# Altium PCB Kanaloa_v2.0.0_Motor.PcbDoc (part 3 of 3)
Units mil, origin at the board's own origin, x right, y up, seen from the top; angles counter-clockwise.
Board outline 5000 x 6000 mil, 4 copper layers (Top Layer, +24V, GND, Bottom Layer), stack 62 mil thick; 213 components, 187 nets, 1008 pads, 744 vias.
Unrouted connection lines stored in the file: 2.
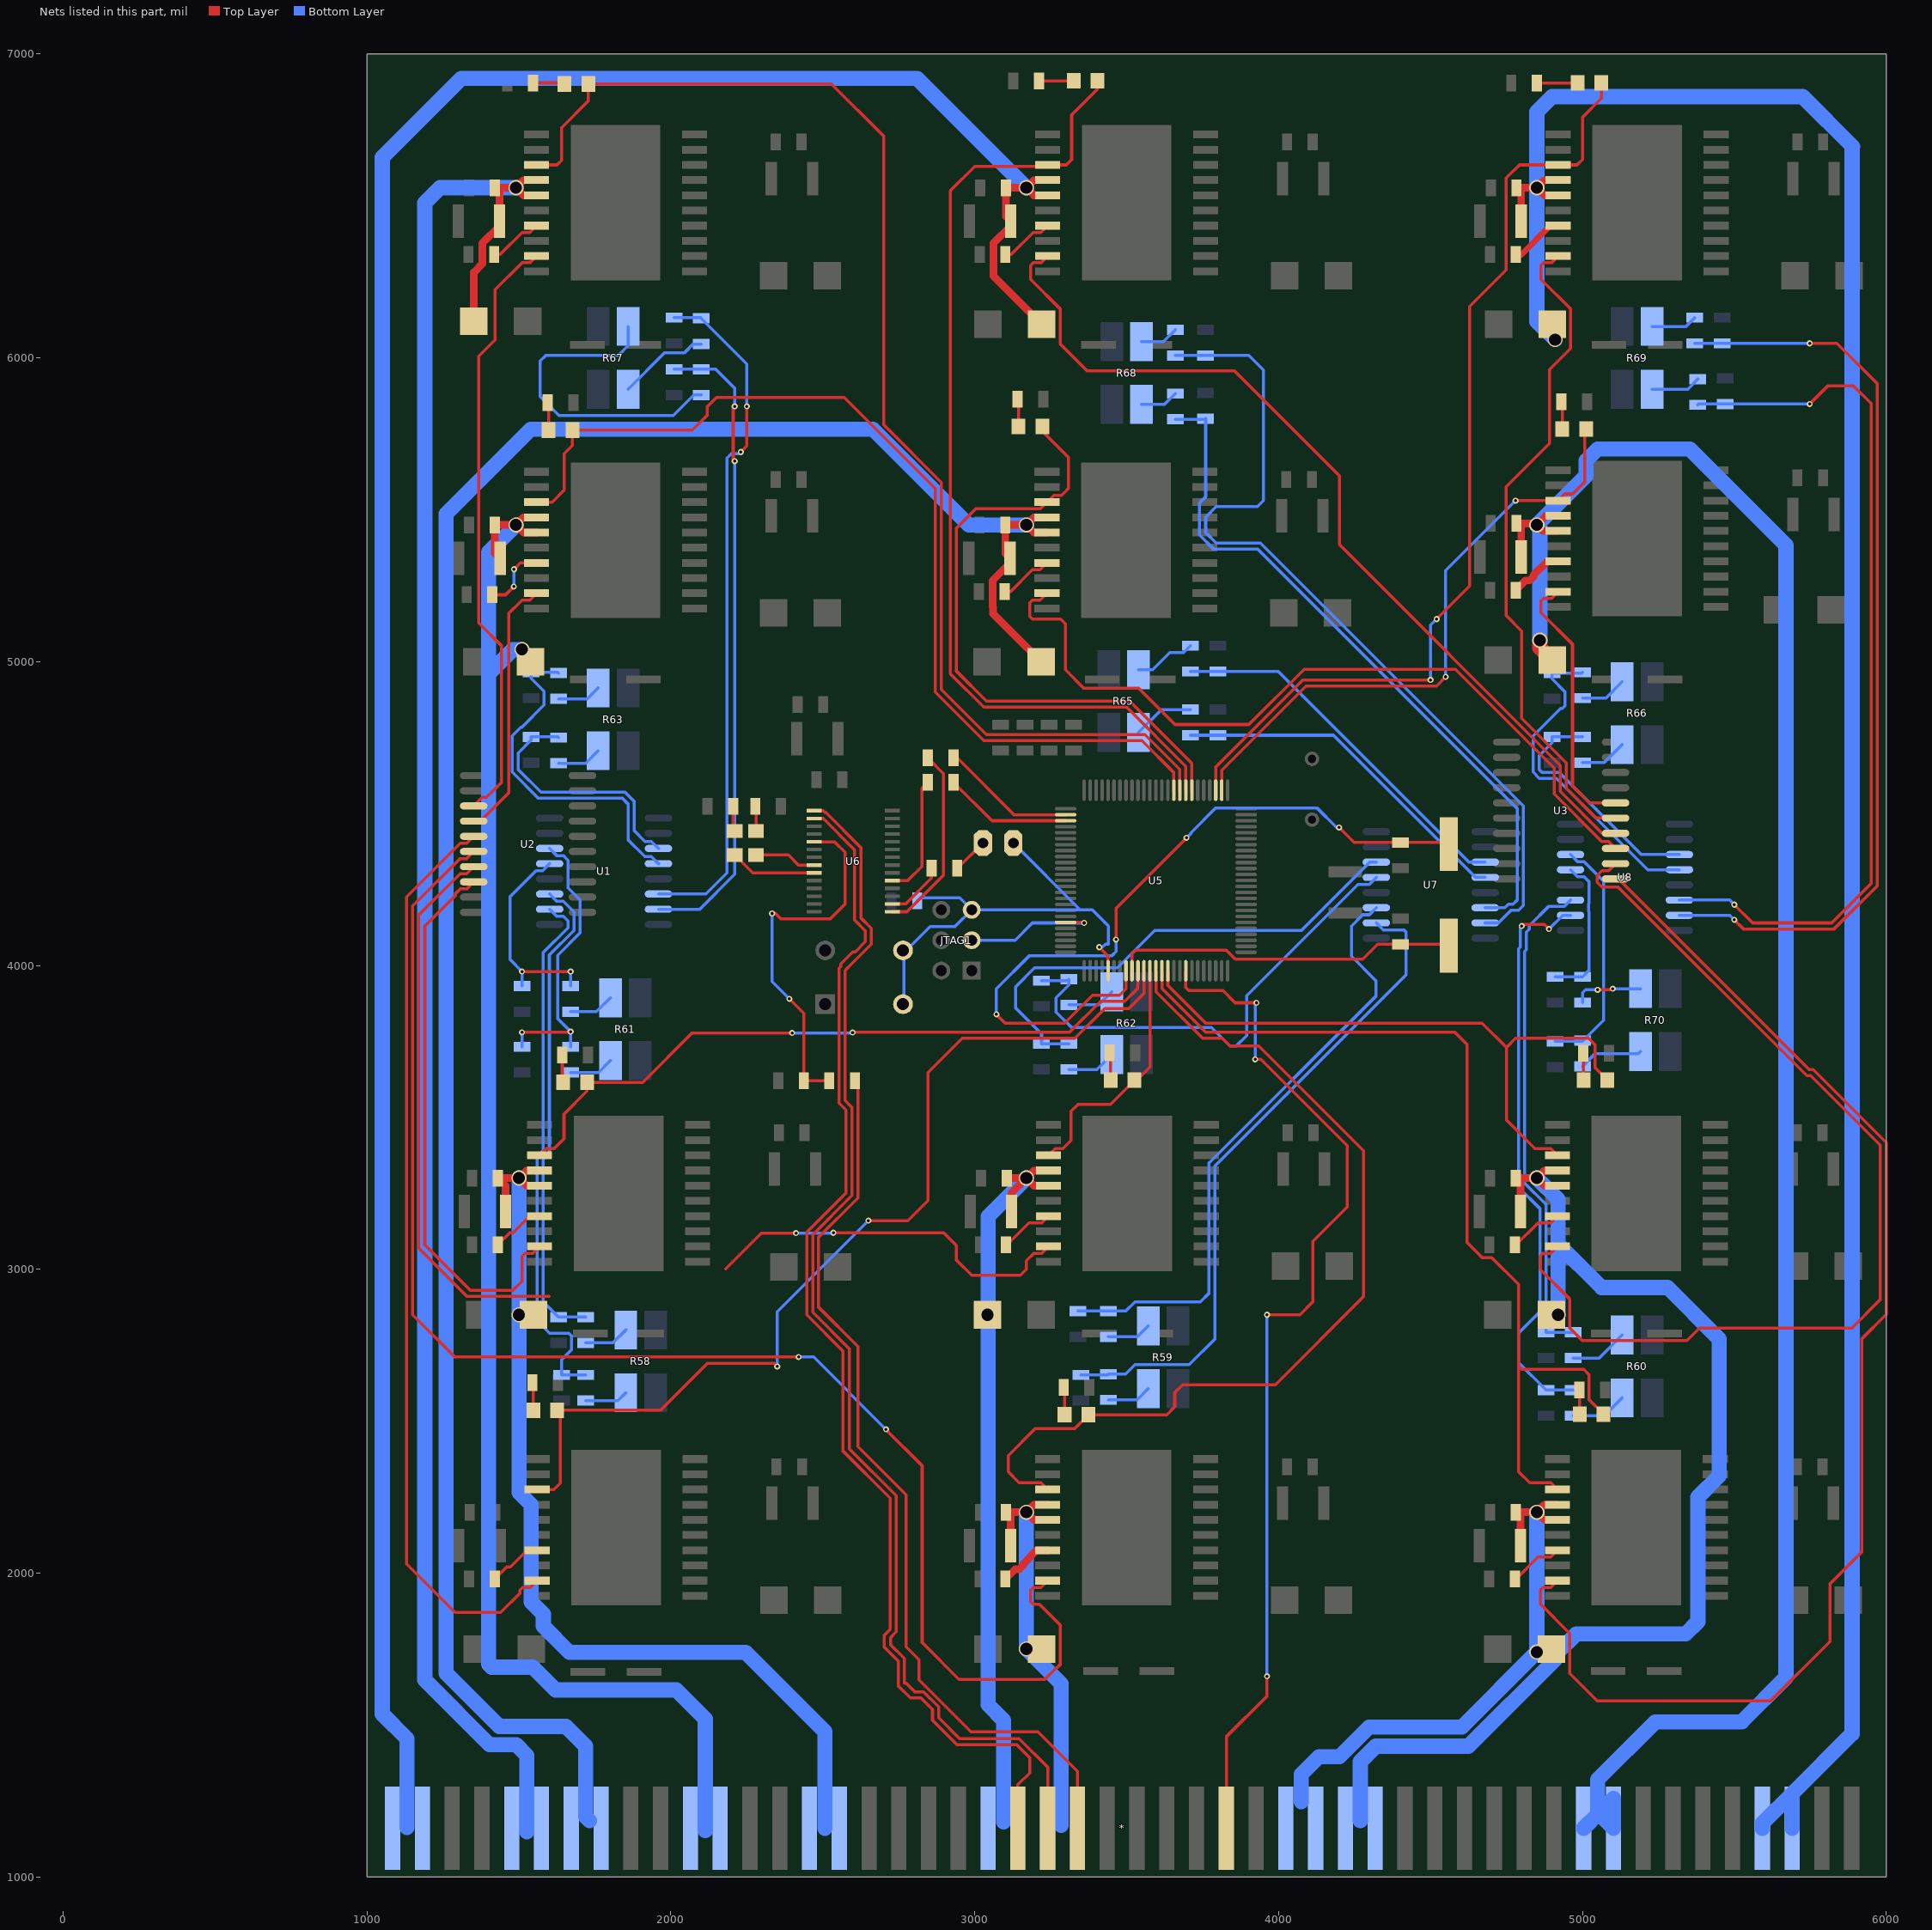
[diagram p5: the nets of this part, all layers, seen from the top]

## Via types
v1: diameter 50, hole 35, Top Layer to Bottom Layer, 336 vias
v2: diameter 20, hole 10, Top Layer to Bottom Layer, 183 vias
v3: diameter 30, hole 20, Top Layer to Bottom Layer, 137 vias
v4: diameter 50, hole 40, Top Layer to Bottom Layer, 87 vias
v5: diameter 25, hole 10, Top Layer to Bottom Layer, 1 vias

## Nets (pads, with @x,y where several pads share a name; then routed paths per layer and width w, separated by ;. In a path a pad name is that pad's centre, name@x,y a point inside that pad or via, vN(x,y) a via of type N, cw(c..) or ccw(c..) an arc to the next point about the centre after c; other vN are vias at no path point) (continued)
"MOTOR-_Motor 1": "C11_Motor 1.2" "C14_Motor 1.2" "D2_Motor 1.2" *.72 *.73 pad.14@3240.16,2225 pad.15@3240.16,2175 | length 1421.8
  Top Layer w25: 3118.54,2090 3118.54,2184.41 3102.95,2200 v4(3170,2200) ; pad.15@3240.16,2175 3195,2175 v4(3170,2200) ; pad.14@3240.16,2225 3195,2225 v4(3170,2200)
  Bottom Layer w50: v4(3170,2200) v4(3170,1750) 3284,1636 3284,1170
"MOTOR-_Motor 2": "C11_Motor 2.2" "C14_Motor 2.2" "D2_Motor 2.2" *.80 *.81 pad.14@4917.64,2225 pad.15@4917.64,2175 | length 1833.9
  Top Layer w25: 4796.02,2090 4796.02,2184.41 4780.43,2200 v4(4850,2200) ; pad.15@4917.64,2175 4875,2175 v4(4850,2200) ; pad.14@4917.64,2225 4875,2225 v4(4850,2200)
  Bottom Layer w50: 4075,1247 4075,1337 4133,1395 4200,1395 4298,1493 4603,1493 v4(4850,1740) v4(4850,2200)
"MOTOR-_Motor 3": "C11_Motor 3.2" "C14_Motor 3.2" "D2_Motor 3.2" *.64 *.65 pad.14@1567.83,3325 pad.15@1567.83,3275 | length 3243
  Top Layer w25: 1455.83,3190 1455.83,3274.8 1430.63,3300 v4(1500,3300) ; pad.15@1567.83,3275 1525,3275 v4(1500,3300) ; pad.14@1567.83,3325 1525,3325 v4(1500,3300)
  Bottom Layer w50: v4(1500,3300) v4(1500,2850) 1500,2264.85 1540,2224.85 1540,1905 1580,1865 1580,1825.15 1666.15,1739 2246,1739 2507,1478 2507,1160
"MOTOR-_Motor 4": "C11_Motor 4.2" "C14_Motor 4.2" "D2_Motor 4.2" *.70 *.71 pad.14@3242.48,3325 pad.15@3242.48,3275 | length 2553.1
  Top Layer w25: 3105.28,3300 v4(3170,3300) ; 3120.87,3190 3120.87,3250.87 v4(3170,3300) ; pad.15@3242.48,3275 3195,3275 v4(3170,3300) ; pad.14@3242.48,3325 3195,3325 v4(3170,3300)
  Bottom Layer w50: 3095,1181 3095,1515 3044,1566 3044,3174 v4(3170,3300)
  other v4: 3041.42,2850
"MOTOR-_Motor 5": "C11_Motor 5.2" "C14_Motor 5.2" "D2_Motor 5.2" *.82 *.83 pad.14@4917.83,3325 pad.15@4917.83,3275 | length 3944.3
  Top Layer w25: 4796.22,3190 4796.22,3284.41 4780.63,3300 v4(4850,3300) ; pad.15@4917.83,3275 4875,3275 v4(4850,3300) ; pad.14@4917.83,3325 4875,3325 v4(4850,3300)
  Bottom Layer w50: 4269,1185 4269,1379 4320,1430 4624.85,1430 4910,1715.15 4910,1730 4980,1800 5340,1800 5380,1840 5380,2249.71 5450,2319.71 5450,2770 5280,2940 5062.64,2940 4920,3082.64 ; v4(4850,3300) 4920,3230 4920,3082.64 ; v4(4920,2850) 4920,3082.64
"MOTOR-_Motor 6": "C11_Motor 6.2" "C14_Motor 6.2" "D2_Motor 6.2" *.60 *.61 pad.14@1557.87,5475 pad.15@1557.87,5425 | length 5416.2
  Top Layer w25: 1437.91,5340 1420.67,5357.24 1420.67,5450 v4(1490,5450) ; pad.15@1557.87,5425 1515,5425 v4(1490,5450) ; pad.14@1557.87,5475 1515,5475 v4(1490,5450)
  Bottom Layer w50: 1409,4969 1480,5040 v4(1510,5040) ; v4(1490,5450) 1400,5360 1400,1700 1410,1690 1545.44,1690 1620.44,1615 2018,1615 2113,1520 2113,1152
"MOTOR-_Motor 7": "C11_Motor 7.2" "C14_Motor 7.2" "D2_Motor 7.2" *.56 *.57 pad.14@3237.64,5475 pad.15@3237.64,5425 | length 7552.7
  Top Layer w25: 3218.11,5000 3060,5158.11 3060,5179.88 3058.88,5181 3058.88,5266.88 3116.02,5324.02 3116.02,5340 3100.43,5355.59 3100.43,5450 v4(3170,5450) ; pad.15@3237.64,5425 3195,5425 v4(3170,5450) ; pad.14@3237.64,5475 3195,5475 v4(3170,5450)
  Bottom Layer w50: 1732,1184.85 1719,1197.85 1719,1430 1654,1495 1435.15,1495 1260,1670.15 1260,5486.36 1538.64,5765 2665,5765 2980,5450 v4(3170,5450)
"MOTOR-_Motor 8": "C11_Motor 8.2" "C14_Motor 8.2" "D2_Motor 8.2" *.90 *.91 pad.14@4920,5480 pad.15@4920,5430 | length 6800.9
  Top Layer w25: 4798.39,5345 4798.39,5439.41 4782.8,5455 4845,5455 v4(4850,5450) ; pad.15@4920,5430 4870,5430 v4(4850,5450) ; pad.14@4920,5480 4880,5480 v4(4850,5450)
  Top Layer w50: v4(4860,5070) 4860,5045.47 4900.47,5005
  Bottom Layer w50: v4(4860,5070) 4860,5440 v4(4850,5450) 5011.73,5611.73 5011.73,5661.93 5049.8,5700 5353,5700 5670,5383 5670,1656 5524,1510 5240,1510 5050,1320 5050,1212 5053,1209 ; *.90@5004,1160 5053,1209 ; 5053,1209 5102,1258 *.91@5102,1160 5053,1209
"MOTOR-_Motor 9": "C11_Motor 9.2" "C14_Motor 9.2" "D2_Motor 9.2" *.54 *.55 pad.14@1557.83,6585 pad.15@1557.83,6535 | length 6580.8
  Top Layer w25: 1351.42,6120 1351.42,6281.42 1379.07,6309.07 1379.07,6376.88 1436.22,6434.02 1436.22,6450 1436.22,6544.41 1420.63,6560 v4(1490,6560) ; pad.15@1557.83,6535 1515,6535 v4(1490,6560) ; pad.14@1557.83,6585 1515,6585 v4(1490,6560)
  Bottom Layer w50: v4(1490,6560) 1240,6560 1190,6510 1190,1648 1403,1435 1491,1435 1526,1400 1526,1148
"MOTOR-_Motor 10": "C11_Motor 10.2" "C14_Motor 10.2" "D2_Motor 10.2" *.50 *.51 pad.14@3240.16,6585 pad.15@3240.16,6535 | length 8682.5
  Top Layer w25: 3220.63,6110 3061.4,6269.23 3061.4,6376.88 3118.54,6434.02 3118.54,6450 3102.95,6465.59 3102.95,6560 v4(3170,6560) ; pad.15@3240.16,6535 3195,6535 v4(3170,6560) ; pad.14@3240.16,6585 3195,6585 v4(3170,6560)
  Bottom Layer w50: 1131,1162 1131,1455 1050,1536 1050,6660 1310,6920 2810,6920 v4(3170,6560)
"MOTOR-_Motor 11": "C11_Motor 11.2" "C14_Motor 11.2" "D2_Motor 11.2" *.96 *.97 pad.14@4920.16,6585 pad.15@4920.16,6535 | length 8019.3
  Top Layer w25: 4798.54,6450 4798.54,6544.41 4782.95,6560 v4(4850,6560) ; pad.15@4920.16,6535 4875,6535 v4(4850,6560) ; pad.14@4920.16,6585 4875,6585 v4(4850,6560)
  Bottom Layer w50: v4(4910,6060) 4850,6120 v4(4850,6560) 4850,6810 4900,6860 5725.15,6860 5890,6695.15 ; *.96@5592,1160 5592,1176 *.97@5690,1274 ; *.97@5690,1160 *.97@5690,1274 ; 5886,1470 *.97@5690,1274 ; 5887.5,1470 5887.5,6695.15
Net29_1: R27.2 R29.1 U7.6 | length 1669.7
  Bottom Layer w10: R27.2@3310,3742.32 R29.1@3220,3742.32 3220,3774.64 3135,3859.64 3135,3930.5 3196.82,3992.32 3470,3992.32 3592.98,4115.3 4075.3,4115.3 4300,4340 U7.6@4321.73,4340
NetC4_2: C4.2@2857.68,4320 U6.2 | length 196.4
  Top Layer w10: U6.2@2728.94,4202.33 2772.33,4202.33 2857.68,4287.68 C4.2@2857.68,4320
"NetC9_Motor 0_2": C9_0.2 pad.17@1559.53,2075 | length 185.9
  Top Layer w10: C9_0.2@1420,1980 1459.88,2019.88 1471.61,2019.88 1526.73,2075 pad.17@1559.53,2075 pad.17@1554.53,2070
"NetC9_Motor 1_2": "C9_Motor 1.2" pad.17@3240.16,2075 | length 181.8
  Top Layer w25: 3100.63,1980 3133.01,2012.38 3146.56,2012.38 3159.74,2025.56 3159.74,2030.54 3204.2,2075 pad.17@3240.16,2075
"NetC9_Motor 2_2": "C9_Motor 2.2" pad.17@4917.64,2075 | length 178.9
  Top Layer w10: 4778.11,1980 4781.06,1980 4853.85,2052.8 4895.43,2052.8 pad.17@4917.64,2075
"NetC9_Motor 3_2": "C9_Motor 3.2" pad.17@1567.83,3175 | length 177.2
  Top Layer w10: 1430,3080 1469.88,3119.88 1480.74,3119.88 1535.86,3175 pad.17@1567.83,3175
"NetC9_Motor 4_2": "C9_Motor 4.2" pad.17@3242.48,3175 | length 178.9
  Top Layer w10: 3102.95,3080 3105.9,3080 3178.69,3152.8 3220.28,3152.8 pad.17@3242.48,3175
"NetC9_Motor 5_2": "C9_Motor 5.2" pad.17@4917.83,3175 | length 178.9
  Top Layer w10: 4778.31,3080 4781.25,3080 4854.05,3152.8 4895.63,3152.8 pad.17@4917.83,3175
"NetC9_Motor 6_2": "C9_Motor 6.2" pad.17@1557.87,5325 | length 221.8
  Top Layer w10: 1412.32,5220 1456,5220 v2(1483,5247) ; v2(1484,5304) 1505,5325 pad.17@1557.87,5325
  Bottom Layer w10: v2(1483,5247) 1483,5303 v2(1484,5304)
"NetC9_Motor 7_2": "C9_Motor 7.2" pad.17@3237.64,5325 | length 178.9
  Top Layer w10: 3098.11,5230 3117.29,5230 3190.09,5302.8 3215.43,5302.8 pad.17@3237.64,5325
"NetC9_Motor 8_2": "C9_Motor 8.2" pad.17@4920,5330 | length 181.8
  Top Layer w25: 4780.47,5235 4812.85,5267.38 4826.41,5267.38 4839.59,5280.56 4839.59,5285.54 4884.05,5330 pad.17@4920,5330
"NetC9_Motor 9_2": "C9_Motor 9.2" pad.17@1557.83,6435 | length 178.9
  Top Layer w10: 1418.31,6340 1437.49,6340 1510.28,6412.8 1535.63,6412.8 pad.17@1557.83,6435
"NetC9_Motor 10_2": "C9_Motor 10.2" pad.17@3240.16,6435 | length 178.9
  Top Layer w10: 3100.63,6340 3119.81,6340 3192.61,6412.8 3217.95,6412.8 pad.17@3240.16,6435
"NetC9_Motor 11_2": "C9_Motor 11.2" pad.17@4920.16,6435 | length 178.9
  Top Layer w20: 4780.63,6340 4799,6340 4894,6435 pad.17@4920.16,6435
"NetLED2_Motor 0_1": LED2.1@1547,2536 R3.1 | length 91.2
  Top Layer w10: R3.1@1544.05,2626 1547,2623.05 LED2.1@1547,2536
"NetLED2_Motor 1_1": "LED2_Motor 1.1" "R3_Motor 1.1" | length 91.2
  Top Layer w10: 3292.68,2611 3295.63,2608.05 3295.63,2521
"NetLED2_Motor 2_1": "LED2_Motor 2.1" "R3_Motor 2.1" | length 80.3
  Top Layer w10: 4990,2603 4990,2523.63 4990.63,2523
"NetLED2_Motor 3_1": "LED2_Motor 3.1" "R3_Motor 3.1" | length 91.2
  Top Layer w10: 1642.35,3705 1642.35,3617.95 1645.31,3615
"NetLED2_Motor 4_1": "LED2_Motor 4.1" "R3_Motor 4.1" | length 91.2
  Top Layer w10: 3444,3712 3446.95,3709.05 3446.95,3622
"NetLED2_Motor 5_1": "LED2_Motor 5.1" "R3_Motor 5.1" | length 89.4
  Top Layer w10: 5002.68,3711 5003.63,3710.05 5003.63,3622
"NetLED2_Motor 6_1": "LED2_Motor 6.1" "R3_Motor 6.1" | length 91.2
  Top Layer w10: 1594.39,5852 1597.35,5849.05 1597.35,5762
"NetLED2_Motor 7_1": "LED2_Motor 7.1" "R3_Motor 7.1" | length 91.2
  Top Layer w10: 3141.16,5864 3144.11,5861.05 3144.11,5774
"NetLED2_Motor 8_1": "LED2_Motor 8.1" "R3_Motor 8.1" | length 91.2
  Top Layer w10: 4930.52,5856 4933.47,5853.05 4933.47,5766
"NetLED2_Motor 9_1": "LED2_Motor 9.1" "R3_Motor 9.1" | length 104.7
  Top Layer w10: 1546.32,6905 1646.16,6905 1649.63,6901.53
"NetLED2_Motor 10_1": "LED2_Motor 10.1" "R3_Motor 10.1" | length 114.7
  Top Layer w10: 3211.32,6911 3212.32,6912 3325.63,6912
"NetLED2_Motor 11_1": "LED2_Motor 11.1" "R3_Motor 11.1" | length 133.7
  Top Layer w10: 4850.32,6904 4982.63,6904 4983.63,6905
NetR4_2: R4.2 U6.1 | length 625.3
  Top Layer w10: U6.1@2728.94,4176.74 2776.74,4176.74 2897,4297 2897,4631.43 R4.2@2845.35,4683.08
NetR5_2: R5.2 U6.5 | length 401.6
  Top Layer w10: U6.5@2728.94,4279.1 2779.1,4279.1 2825.94,4325.94 2825.94,4583.67 R5.2@2845.35,4603.08
NetR10_1: R10.1 R58.0 | length 149.1
  Bottom Layer w10: R10.1@1720,2757.68 1809.25,2757.68 R58.0@1851.57,2800
NetR10_2: R10.2 R12.1 U1.3 | length 1591.1
  Bottom Layer w10: U1.3@1600.87,4235 1624.06,4211.81 1645.44,4211.81 1681.14,4176.11 1681.14,4115.61 1600,4034.47 1600,3383.43 1580,3363.43 1580,2892.32 R12.1@1630,2842.32 R10.2@1720,2842.32
NetR11_1: R11.1 R58.2 | length 142.2
  Bottom Layer w10: R11.1@1720,2567.68 1825.94,2567.68 R58.2@1851.57,2593.31
NetR11_2: R11.2 R13.1 U1.2 | length 1789.2
  Bottom Layer w10: U1.2@1600.87,4185 1624.06,4161.81 1645.44,4161.81 1661.14,4146.11 1661.14,4123.89 1580,4042.75 1580,3391.72 1560,3371.72 1560,2830 1600.59,2789.41 1663.77,2789.41 1672.56,2780.62 1672.56,2734.73 1640,2702.17 R13.1@1640,2652.32 R11.2@1720,2652.32
NetR14_1: R14.1 R59.0 | length 145.6
  Bottom Layer w10: R14.1@3440,2777.68 3535.12,2777.68 R59.0@3570.79,2813.35
NetR14_2: R14.2 R16.1 U7.3 | length 2032.2
  Bottom Layer w10: R16.1@3340,2862.32 R14.2@3440,2862.32 3497.17,2862.32 3527.17,2892.32 3742.32,2892.32 3770,2920 3770,3350 3771.72,3350 4320,3898.28 4320,3950 4240,4030 4240,4129.65 4277.16,4166.81 4298.54,4166.81 U7.3@4321.73,4190
NetR15_1: R15.1 R59.2 | length 146
  Bottom Layer w10: R15.1@3440,2570 3534.13,2570 R59.2@3570.79,2606.65
NetR15_2: R15.2 R17.1 U7.2 | length 2200.4
  Bottom Layer w10: R17.1@3350,2652.32 3437.68,2652.32 R15.2@3440,2654.65 3496.19,2654.65 3527.17,2685.63 3705.63,2685.63 3790,2770 3790,3340 4420,3970 4420,4110 4413.19,4116.81 4344.92,4116.81 U7.2@4321.73,4140
NetR18_1: R18.1 R60.0 | length 192.1
  Bottom Layer w10: R18.1@4970,2707.68 5055.12,2707.68 R60.0@5130.79,2783.35
NetR18_2: R18.2 R20.1 U8.3 | length 1634.2
  Bottom Layer w10: U8.3@4960.87,4215 4940.87,4195 4889.64,4195 4825,4130.36 4825,4119.64 4815,4109.64 4815,4051.36 4810,4046.36 4810,3283.43 4880,3213.43 R20.1@4880,2792.32 R18.2@4970,2792.32
NetR19_1: R19.1 R60.2 | length 185.2
  Bottom Layer w10: R19.1@4970,2517.68 5071.81,2517.68 R60.2@5130.79,2576.65
NetR19_2: R19.2 R21.1 U8.2 | length 1904.9
  Top Layer w10: v2(4800,4130) 4805,4135 4875,4135 v2(4890,4120)
  Bottom Layer w10: v2(4800,4130) 4795,4125 4795,4059.64 4790,4054.64 4790,3270 4860,3200 4860,2860 4790,2790 4790,2692.32 R21.1@4880,2602.32 R19.2@4970,2602.32 ; v2(4890,4120) 4935,4165 U8.2@4960.87,4165
NetR22_1: R22.1 R61.0 | length 149.7
  Bottom Layer w10: R22.1@1670,3847.68 1755.12,3847.68 R61.0@1800.79,3893.35
NetR22_2: R22.2 R24.1 U1.5 | length 693.7
  Top Layer w10: v2(1510,3980) v2(1670,3980)
  Bottom Layer w10: R24.1@1510,3932.32 v2(1510,3980) 1470,4020 1470,4225.51 1556.3,4311.81 1577.68,4311.81 U1.5@1600.87,4335 ; R22.2@1670,3932.32 v2(1670,3980)
NetR23_1: R23.1 R61.2 | length 146.9
  Bottom Layer w10: R23.1@1670,3647.68 1761.81,3647.68 R61.2@1800.79,3686.65
NetR23_2: R23.2 R25.1 U1.6 | length 963.5
  Top Layer w10: v2(1510,3780) 1667.83,3780 v2(1670,3782.17)
  Bottom Layer w10: R25.1@1510,3732.32 v2(1510,3780) ; U1.6@1600.87,4385 1624.06,4361.81 1645.44,4361.81 1661.14,4346.11 1661.14,4255.53 1701.14,4215.53 1701.14,4107.33 1627.44,4033.63 1627.44,3824.73 v2(1670,3782.17) R23.2@1670,3732.32
NetR26_1: R26.1 R62.0 | length 158.7
  Bottom Layer w10: R26.1@3310,3870 3407.44,3870 R62.0@3450.79,3913.35
NetR26_2: R26.2 R28.1 U7.5 | length 1624.3
  Bottom Layer w10: R28.1@3220,3950 3305.35,3950 R26.2@3310,3954.65 3310,3935.5 3267.44,3892.95 3267.44,3847.05 3319.14,3795.35 3779.29,3795.35 3839.64,3735 3860.36,3735 3894.65,3769.29 3894.65,3900 4261.46,4266.81 4298.54,4266.81 U7.5@4321.73,4290
NetR27_1: R27.1 R62.2 | length 161.1
  Bottom Layer w10: R27.1@3310,3657.68 3401.81,3657.68 R62.2@3450.79,3706.65
NetR30_1: R30.1 R70.0 | length 235.3
  Top Layer w10: v2(5050,3920) 5096.65,3920 v2(5100,3923.35)
  Bottom Layer w10: R30.1@5000,3877.68 5000,3910 5010,3920 v2(5050,3920) ; v2@5093.35,3923.35 v2(5100,3923.35) R70.0@5190.79,3923.35
NetR30_2: R30.2 R32.1 U8.5 | length 489.9
  Bottom Layer w10: R32.1@4910,3962.32 R30.2@5000,3962.32 5021.14,3983.46 5021.14,4177.25 5020,4178.39 5020,4202.75 5021.14,4203.89 5021.14,4276.11 5005.44,4291.81 4984.06,4291.81 U8.5@4960.87,4315
NetR31_1: R31.1 R70.2 | length 211.1
  Bottom Layer w10: R31.1@5000,3667.68 5042.32,3710 5184.13,3710 R70.2@5190.79,3716.65
NetR31_2: R31.2 R33.1 U8.6 | length 791.7
  Bottom Layer w10: R33.1@4910,3750 4997.68,3750 R31.2@5000,3752.32 5002.32,3752.32 5070,3820 5070,4277.25 5005.44,4341.81 4984.06,4341.81 U8.6@4960.87,4365
NetR34_1: R34.1 R63.0 | length 145.6
  Bottom Layer w10: R34.1@1630,4877.68 1725.12,4877.68 R63.0@1760.79,4913.35
NetR34_2: R34.2 R36.1 U1.12 | length 1157.9
  Bottom Layer w10: R34.2@1630,4962.32 1627.68,4964.65 R36.1@1540,4964.65 1540,4945.5 1582.56,4902.95 1582.56,4857.05 1509.56,4784.06 1506.23,4784.06 1477.44,4755.27 1477.44,4636.45 1563.89,4550 1840.57,4550 1858.86,4531.72 1858.86,4413.89 1914.56,4358.19 1935.94,4358.19 U1.12@1959.13,4335
NetR35_1: R35.1 R63.2 | length 147.9
  Bottom Layer w10: R35.1@1630,4665.35 1719.49,4665.35 R63.2@1760.79,4706.65
NetR35_2: R35.2 R37.1 U1.11 | length 841.8
  Bottom Layer w10: R35.2@1630,4750 1627.68,4752.32 R37.1@1540,4752.32 1540,4741.97 1497.44,4699.41 1497.44,4644.73 1572.17,4570 1848.86,4570 1878.86,4540 1878.86,4443.89 1914.56,4408.19 1935.94,4408.19 U1.11@1959.13,4385
NetR38_1: R38.1 R65.0 | length 202.1
  Bottom Layer w10: R65.0@3539.21,4766.65 3614.88,4842.32 R38.1@3710,4842.32
NetR38_2: R38.2 R40.1 U7.12 | length 1163.7
  Bottom Layer w10: R38.2@3710,4757.68 R40.1@3800,4757.68 4180.61,4757.68 4648.28,4290 U7.12@4680,4290
NetR39_1: R39.1 R65.2 | length 203.5
  Bottom Layer w10: R65.2@3539.21,4973.35 3585.06,4973.35 3641.72,5030 3687.68,5030 R39.1@3710,5052.32
NetR39_2: R39.2 R41.1 U7.11 | length 1230
  Bottom Layer w10: R39.2@3710,4967.68 R41.1@3800,4967.68 3998.89,4967.68 4626.57,4340 U7.11@4680,4340
NetR42_1: R42.1 R66.0 | length 152.9
  Bottom Layer w10: R42.1@5000,4880 5077.44,4880 R66.0@5130.79,4933.35
NetR42_2: R42.2 R44.1 U8.12 | length 1106.2
  Bottom Layer w10: R42.2@5000,4964.65 4997.68,4962.32 R44.1@4900,4962.32 4900,4943.18 4942.56,4900.62 4942.56,4854.73 4933.77,4845.94 4928.12,4845.94 4837.44,4755.27 4837.44,4636.45 4857.94,4615.94 4914.06,4615.94 5215,4315 U8.12@5319.13,4315
NetR43_1: R43.1 R66.2 | length 155.2
  Bottom Layer w10: R43.1@5000,4667.68 5071.81,4667.68 R66.2@5130.79,4726.65
NetR43_2: R43.2 R45.1 U8.11 | length 802.8
  Bottom Layer w10: R43.2@5000,4752.32 R45.1@4900,4752.32 4900,4733.18 4857.44,4690.62 4857.44,4644.73 4866.23,4635.94 4922.34,4635.94 5193.28,4365 U8.11@5319.13,4365
NetR46_1: R46.1 R67.0 | length 302.4
  Bottom Layer w10: R67.0@1859.21,5896.65 1978.5,6015.94 2043.77,6015.94 2073.18,6045.35 R46.1@2100,6045.35
NetR46_2: R46.2 R48.1 U1.14 | length 2274.7
  Top Layer w10: v2(2230,5690) 2250,5710 v2(2250,5840)
  Bottom Layer w10: U1.14@1959.13,4235 2115,4235 2185,4305 2185,5670.36 2199.64,5685 2225,5685 v2(2230,5690) ; R48.1@2010,6132.32 2097.68,6132.32 R46.2@2100,6130 2250,5980 v2(2250,5840)
NetR47_1: R47.1 R67.2 | length 1074.9
  Bottom Layer w10: R67.2@1859.21,6103.35 1859.21,6040.21 1826.5,6007.5 1587.5,6007.5 1570,5990 1570,5871.89 1631.89,5810 2007.83,5810 2075.5,5877.68 R47.1@2100,5877.68
NetR47_2: R47.2 R49.1 U1.15 | length 2128.5
  Top Layer w10: v2(2210,5660) 2205,5665 2205,5835 v2(2210,5840)
  Bottom Layer w10: U1.15@1959.13,4185 2095,4185 2210,4300 v2(2210,5660) ; R49.1@2010,5962.32 R47.2@2100,5962.32 2147.68,5962.32 2210,5900 v2(2210,5840)
NetR50_1: R50.1 R68.0 | length 125.6
  Bottom Layer w10: R68.0@3549.21,5846.65 3624.33,5846.65 R50.1@3660,5882.32
NetR50_2: R50.2 R52.1 U7.14 | length 2327.3
  Bottom Layer w10: R50.2@3660,5797.68 3757.68,5797.68 R52.1@3760,5800 3760,5542.43 3740,5522.43 3740,5416.86 3786.86,5370 3931.72,5370 4785,4516.72 4785,4215 4771.82,4201.82 4756.63,4201.82 4744.81,4190 U7.14@4680,4190
NetR51_1: R51.1 R68.2 | length 126.9
  Bottom Layer w10: R68.2@3549.21,6053.35 3621.02,6053.35 R51.1@3660,6092.32
NetR51_2: R51.2 R53.1 U7.15 | length 2896.9
  Bottom Layer w10: R51.2@3660,6007.68 R53.1@3760,6007.68 3902.32,6007.68 3950,5960 3950,5530 3930,5510 3795.15,5510 3760,5474.85 3760,5425.15 3795.15,5390 3940,5390 4805,4525 4805,4196.82 4790,4181.82 4764.92,4181.82 4723.1,4140 U7.15@4680,4140
NetR54_1: R54.1 R69.0 | length 164.6
  Bottom Layer w10: R69.0@5229.21,5896.65 5346.65,5896.65 R54.1@5380,5930
NetR54_2: R54.2 R56.1 U8.14 | length 2915
  Top Layer w10: v2(5500,4200) 5560,4140 5820,4140 5950,4270 5950,5850 5892.93,5907.07 5807.07,5907.07 v2(5747.68,5847.68)
  Bottom Layer w10: U8.14@5319.13,4215 5485,4215 v2(5500,4200) ; R54.2@5380,5845.35 5382.32,5847.68 R56.1@5470,5847.68 v2(5747.68,5847.68)
NetR55_1: R55.1 R69.2 | length 152.8
  Bottom Layer w10: R69.2@5229.21,6103.35 5341.02,6103.35 R55.1@5370,6132.32
NetR55_2: R55.2 R57.1 U8.15 | length 3036.7
  Top Layer w10: v2(5500,4150) 5530,4120 5828.28,4120 5970,4261.72 5970,5915.35 5837.68,6047.68 v2(5747.68,6047.68)
  Bottom Layer w10: U8.15@5319.13,4165 5485,4165 v2(5500,4150) ; R55.2@5370,6047.68 R57.1@5460,6047.68 v2(5747.68,6047.68)
prejumpreset: 1.1 C4.1@2942.32,4320 | length 119.1
  Top Layer w10: C4.1@2942.32,4320 2944,4320 1.1@3027,4403
PWM0: LED2.2@1625.74,2536 pad.13@1559.53,2275 U5.36 | length 3265.5
  Top Layer w10: pad.13@1559.53,2275 1615,2275 1635.87,2295.87 1635.87,2521.75 LED2.2@1621.61,2536 ; LED2.2@1625.74,2536 1966,2536 2120,2690 2340,2690 v2(2350,2680) ; v2(2650,3160) 2780,3160 2846,3226 2846,3647 2959,3760 3330,3760 3428,3858 3507,3858 3556.54,3907.54 3556.54,3926.54 ; 3556.54,3926.85 3556.54,3926.54 ; U5.36@3556.85,3982.32 3556.85,3926.85 3556.54,3926.54
  Bottom Layer w10: v2(2350,2680) 2350,2860 v2(2650,3160)
PWM1: "LED2_Motor 1.2" pad.13@3240.16,2275 U5.38 | length 3050.7
  Top Layer w10: pad.13@3240.16,2275 3217.95,2297.2 3146.23,2297.2 3110,2333.43 3110,2386.57 3199,2475.57 3328.94,2475.57 3374.37,2521 3370.24,2521 ; 3398.37,2521 3631.86,2521 3658.27,2547.41 3658.27,2593.77 3684.5,2620 3990,2620 4280,2910 4280,3390 3935,3735 3839.64,3735 3814.64,3760 3750,3760 3596.54,3913.46 U5.38@3596.54,3982.32
PWM2: "LED2_Motor 2.2" pad.13@4917.64,2275 U5.39 | length 3178.6
  Top Layer w10: U5.39@3615.91,3982.32 3615.91,3924.09 3760,3780 4580,3780 4620,3740 4620,3088.16 4670.72,3037.44 4702.56,3037.44 4790,2950 4790,2680 ; pad.13@4917.64,2275 4895.43,2297.2 4826.23,2297.2 4790,2333.43 4790,2680 ; 5069.37,2523 5021.73,2570.64 5021.73,2652.77 5004.5,2670 4800,2670 4790,2680
PWM3: "LED2_Motor 3.2" pad.13@1567.83,3375 U5.35 | length 2313.6
  Top Layer w10: pad.13@1567.83,3375 1590.04,3397.2 1615.39,3397.2 1648,3429.82 1648,3510 1724.05,3586.05 1724.05,3615 1907.17,3615 2070.17,3778 v2(2399,3778) ; v2(2598,3779) 2599,3780 3312,3780 3414,3882 3494,3882 3536.54,3924.54 3536.54,3935.45 3536.85,3935.76 3536.85,3942.6 ; U5.35@3537.17,3947.17 U5.35@3537.17,3982.32
  Bottom Layer w10: v2(2399,3778) 2597,3778 v2(2598,3779)
PWM4: "LED2_Motor 4.2" pad.13@3242.48,3375 U5.37 | length 831.2
  Top Layer w10: pad.13@3242.48,3375 3264.68,3397.2 3290.03,3397.2 3317,3424.17 3317,3520 3340,3543 3446.69,3543 3525.69,3622 ; 3521.57,3622 3525.69,3622 ; U5.37@3576.54,3982.32 3576.54,3666 3532.54,3622 3525.69,3622
PWM5: "LED2_Motor 5.2" pad.13@4917.83,3375 U5.40 | length 2148.1
  Top Layer w10: U5.40@3635.59,3982.32 3635.59,3934.41 3760,3810 4670,3810 4750,3730 ; pad.13@4917.83,3375 4895.63,3397.2 4843.9,3397.2 4750,3491.11 4750,3730 ; 5082.37,3622 5042,3662.37 5042,3738 5020,3760 4780,3760 4750,3730
PWM6: "LED2_Motor 6.2" pad.13@1557.87,5525 U5.85 | length 3318.3
  Top Layer w10: pad.13@1557.87,5525 1609,5525 1649,5565 1649,5684 1676.09,5711.09 1676.09,5762 2070,5762 2120,5812 2120,5840 2150,5870 2570,5870 2870,5570 2870,4900 3030,4740 3550,4740 3655.28,4634.72 U5.85@3655.28,4576.81
PWM7: "LED2_Motor 7.2" pad.13@3237.64,5525 U5.82 | length 2122
  Top Layer w10: 3222.85,5774 3222.85,5758.15 3309,5672 3309,5571.02 3293.98,5555.99 3285.19,5547.2 3259.84,5547.2 pad.13@3237.64,5525 3215.43,5502.8 3003.08,5502.8 2940,5439.72 2940,4968.28 3038.28,4870 3510,4870 3714.33,4665.67 U5.82@3714.33,4576.81
PWM8: "LED2_Motor 8.2" pad.13@4920,5530 U5.77 | length 2033.1
  Top Layer w10: U5.77@3812.76,4576.81 3812.76,4642.76 4090,4920 4520,4920 v2(4550,4950) ; v2(4780,5530) pad.13@4920,5530 4942.2,5552.2 4967.55,5552.2 5008.09,5592.74 5008.09,5766
  Bottom Layer w10: v2(4550,4950) 4550,5300 v2(4780,5530)
PWM9: "LED2_Motor 9.2" pad.13@1557.83,6635 U5.84 | length 4282
  Top Layer w10: pad.13@1557.83,6635 1625,6635 1639.92,6649.92 1639.92,6757 1728.37,6845.45 1728.37,6901.53 2528.47,6901.53 2700,6730 2700,5780 2890,5590 2890,4908 3038,4760 3560,4760 3674.96,4645.04 U5.84@3674.96,4576.81
PWM10: "LED2_Motor 10.2" pad.13@3240.16,6635 U5.83 | length 3305.4
  Top Layer w10: 3404.37,6912 3404.37,6885.37 3319,6800 3319,6653 3301,6635 pad.13@3240.16,6635 3235.16,6630 3000,6630 2920,6550 2920,4960 3030,4850 3500,4850 3694.65,4655.35 U5.83@3694.65,4576.81
PWM11: "LED2_Motor 11.2" pad.13@4920.16,6635 U5.78 | length 3211
  Top Layer w10: U5.78@3793.07,4576.81 3793.07,4653.07 4080,4940 v2(4500,4940) ; v2(4520,5140) 4628.86,5248.86 4628.86,6168.86 4748.9,6288.9 4748.9,6591.45 4792.45,6635 pad.13@4920.16,6635 4982,6635 5000,6653 5000,6792 5062.37,6854.37 5062.37,6905
  Bottom Layer w10: v2(4500,4940) 4500,5120 v2(4520,5140)
RESET: 1.2 10k.2 ?.2 ?.4 JTAG1.5 U5.30 | length 1625
  Top Layer w10: v2(3410,4060) 3438.74,4031.26 U5.30@3438.74,3982.32
  Bottom Layer w10: ?.2@2767.17,3864.5 2767.17,4041.66 2853.11,4127.61 2934.53,4127.61 JTAG1.5@2990,4183.08 ; 10k.2@2810.65,4213 2820.25,4222.61 2950.47,4222.61 JTAG1.5@2990,4183.08 ; 1.2@3127,4403 3346.92,4183.08 ; v2(3410,4060) 3420,4060 3430,4070 3440,4070 3440,4130 3386.92,4183.08 3346.92,4183.08 ; JTAG1.5@2990,4183.08 3346.92,4183.08
RESET#: R8.2 R9.1 U6.19 | length 1231.4
  Top Layer w10: v2(2333,4171) 2344,4171 2361,4154 2525,4154 2573,4202 2573,4372 2537.94,4407.06 U6.19@2471.06,4407.06 ; v2(2390,3890) 2437.65,3842.35 R9.1@2437.65,3620.08 2520,3620.08 R8.2@2521,3621.08
  Bottom Layer w10: v2(2333,4171) 2333,3947 v2(2390,3890)
RLED: LED2.2@2280,4442.45 R7.1 | length 81.6
  Top Layer w10: R7.1@2277.68,4523.08 2280,4520.76 LED2.2@2280,4442.45
"RX LED": LED2.1@2280,4363.71 U6.22 | length 204.9
  Top Layer w10: LED2.1@2280,4363.71 2386.29,4363.71 2419.72,4330.28 U6.22@2471.06,4330.28
SCK: JTAG1.3 U5.20 | length 455.3
  Top Layer w10: U5.20@3298.98,4141.77 3358.23,4141.77 v2(3360,4140)
  Bottom Layer w10: JTAG1.3@2990,4083.08 3133.08,4083.08 3190,4140 v2(3360,4140)
SCL: 
TLED: LED1.2 R6.1 | length 82.8
  Top Layer w10: R6.1@2204.65,4523.08 2204.65,4447.8 LED1.2@2210,4442.45
"TX LED": LED1.1 U6.23 | length 285.5
  Top Layer w10: LED1.1@2210,4363.71 2269.02,4304.69 U6.23@2471.06,4304.69
UC_RX: R4.1 U5.2 | length 434.1
  Top Layer w10: R4.1@2942.32,4683.08 3129.3,4496.1 U5.2@3298.98,4496.1
UC_TX: R5.1 U5.3 | length 421.4
  Top Layer w10: R5.1@2930,4603.08 3056.66,4476.42 U5.3@3298.98,4476.42
USB5V: *.23 R8.1 | length 3002.4
  Top Layer w10: R8.1@2605.65,3621.08 2616,3610.72 2616,3235 2485,3104 2485,2876 2616,2745 2616,2416 2774,2258 2774,1757 2816,1715 2816,1648 2987,1477 3208,1477 3338,1347 *.23@3338,1160
"USB DM": *.21 U6.16 | length 3986.5
  Top Layer w10: U6.16@2471.06,4483.83 2501,4483.83 2605,4379.83 2605,4148.72 2640,4113.72 2640,4078 2607,4045 2598.72,4045 2558.86,4005.14 2558.86,3996.86 2553,3991 2553,3546.72 2575.86,3523.86 2575.86,3250.86 2447,3122 2447,2849.72 2566.86,2729.86 2566.86,2401.14 2721.42,2246.58 2721.42,1814.6 2702.5,1795.67 2702.5,1756.33 2748,1710.83 2748,1628.72 2787.72,1589 2822.92,1589 2861,1550.92 2861,1515.72 2941.72,1435 3138,1435 3181,1392 3181,1342 3142,1303 *.21@3142,1160
"USB DP": *.22 U6.15 | length 4017.5
  Top Layer w10: U6.15@2471.06,4509.42 2501,4509.42 2506.59,4503.83 2509.28,4503.83 2625,4388.11 2625,4157 2660,4122 2660,4069.72 2589.28,3999 2588.72,3999 2577,3987.28 2577,3986.72 2573,3982.72 2573,3555 2595.86,3532.14 2595.86,3242.57 2467,3113.72 2467,2858 2586.86,2738.14 2586.86,2409.43 2741.42,2254.86 2741.42,1806.32 2722.5,1787.39 2722.5,1764.61 2768,1719.11 2768,1637 2774.92,1637 2802.92,1609 2831.21,1609 2881,1559.21 2881,1524 2950,1455 3146.28,1455 3240,1361.28 *.22@3240,1160
"W H O K I L L": *.28 U5.43 | length 3391.6
  Top Layer w10: U5.43@3694.65,3982.32 3694.65,3927.35 3705,3917 3817,3917 3857,3877 v2(3927,3877) ; *.28@3828,1160 3828,1461 3962,1595 v2(3962,1660) ; v2(3923,3691) 3942,3691 4226,3407 4226,3205 4113,3092 4113,2893 4070,2850 v2(3962,2850)
  Bottom Layer w10: v2(3923,3691) 3923,3873 v2(3927,3877) ; v2(3962,1660) v2(3962,2850)
XTAL1: C6.2 U5.34 Y1.1 | length 1138.1
  Top Layer w10: U5.34@3517.48,3982.32 3517.48,4037.48 3530,4050 3827.72,4050 3857.72,4020 4276.42,4020 4326.42,4070 4420,4070 4555,4070 Y1.1@4560,4065
XTAL2: C8.2 U5.33 Y1.2 | length 2498.7
  Top Layer w10: v2(3071,3839) 3100,3810 3296,3810 3388,3902 3477,3902 3497.8,3922.8 U5.33@3497.8,3982.32 ; v2(3465,4085) 3465,4188 v2(3697,4420) ; v2(4199,4454) 4248.35,4404.65 4420,4404.65 4555,4404.65 Y1.2@4560,4399.65
  Bottom Layer w10: v2(3071,3839) 3071,3923.07 3180.25,4032.32 3451.72,4032.32 3465,4045.61 v2(3465,4085) ; v2(3697,4420) 3711,4434 3711,4436 3793.62,4518.62 4126,4518.62 4190.62,4454 v2(4199,4454)
~DIR0: pad.19@1559.53,1975 U2.15 | length 3044.6
  Top Layer w10: U2.15@1350.87,4425 1327.68,4401.81 1306.3,4401.81 1130,4225.51 1130,2030 1290,1870 1440,1870 1503.19,1933.19 1503.19,1944.01 1511.98,1952.8 1537.32,1952.8 pad.19@1559.53,1975
~DIR1: pad.19@3240.16,1975 U2.16 | length 4976.3
  Top Layer w10: 1289,2711 1150,2850 1150,4195.51 1306.3,4351.81 1327.68,4351.81 U2.16@1350.87,4375 ; 1290,2710 1291,2711 v2(2420,2711) ; v2(2708,2473) 2708,2472 2827,2353 2827,1771.28 2948.28,1650 3230,1650 3269.72,1689.72 3272.12,1689.72 3280.91,1698.51 3280.91,1829.09 3212.8,1897.2 3192.61,1897.2 3183.82,1905.99 3183.82,1944.01 3192.61,1952.8 3217.95,1952.8 pad.19@3240.16,1975
  Bottom Layer w10: v2(2420,2711) 2470,2711 v2(2708,2473)
~DIR2: pad.19@4917.64,1975 U3.11 | length 4327.9
  Top Layer w10: pad.19@4917.64,1975 4895.43,1952.8 4870.09,1952.8 4861.3,1944.01 4861.3,1898.58 4958.39,1801.49 4958.39,1669.61 5049,1579 5619,1579 5814.37,1774.37 5814.37,1964.37 5920,2070 5920,2771.72 6000,2851.72 6000,3416.57 5759.13,3657.44 5746.2,3657.44 5118.64,4285 U3.11@5109.13,4285
~DIR3: pad.19@1567.83,3075 U2.18 | length 1822.1
  Top Layer w10: U2.18@1350.87,4275 1327.68,4251.81 1306.3,4251.81 1290.59,4236.11 1290.59,4230 1190,4129.41 1190,3080 1339.72,2930.28 1480,2930.28 1510,2960.28 1510,3042.51 1520.28,3052.8 1545.63,3052.8 pad.19@1567.83,3075
~DIR4: pad.19@3242.48,3075 U2.17 | length 3091
  Top Layer w10: U2.17@1350.87,4325 1327.68,4301.81 1306.3,4301.81 1170,4165.51 1170,3070 1329.72,2910.28 1599.8,2910.28 ; 2180.45,3001.55 2297.89,3119 v2(2412,3119) ; v2(2535,3120) 2897.5,3120 2940,3077.5 2940,3030 2990,2980 3150,2980 3170,3000 3170,3027.87 3194.93,3052.8 3220.28,3052.8 pad.19@3242.48,3075
  Bottom Layer w10: v2(2412,3119) 2534,3119 v2(2535,3120)
~DIR5: pad.19@4917.83,3075 U3.12 | length 3337.9
  Top Layer w10: pad.19@4917.83,3075 4895.63,3052.8 4870.28,3052.8 4861.5,3044.01 4861.5,2998.58 4958.58,2901.49 4958.58,2806.42 4999.8,2765.2 5344.2,2765.2 5385.42,2806.42 5886.42,2806.42 5980,2900 5980,3408.28 5750.84,3637.44 5737.91,3637.44 5117.17,4258.19 5064.56,4258.19 5048.86,4273.89 5048.86,4296.11 5064.56,4311.81 5085.94,4311.81 U3.12@5109.13,4335
~DIR6: pad.19@1557.87,5225 U2.14 | length 863.8
  Top Layer w10: U2.14@1350.87,4475 1373.39,4475 1465.76,4567.37 1465.76,5158.24 1510.32,5202.8 1535.67,5202.8 pad.19@1557.87,5225
~DIR7: pad.19@3237.64,5225 U3.13 | length 2648.4
  Top Layer w10: pad.19@3237.64,5225 3215.43,5202.8 3190.09,5202.8 3181.3,5194.01 3181.3,5148.58 3181.42,5148.58 3190,5140 3282.5,5140 3298,5124.5 3298,4973 3359,4912 3540,4912 3659,4793 3902,4793 4084,4975 4582.25,4975 4907.25,4650 4907.25,4564.47 5063.53,4408.19 5085.94,4408.19 U3.13@5109.13,4385
~DIR8: pad.19@4920,5230 U3.16 | length 885.2
  Top Layer w10: pad.19@4920,5230 4897.8,5207.8 4872.45,5207.8 4863.66,5199.01 4863.66,5160.99 4967.25,5057.41 4967.25,4591.04 5023.28,4535 U3.16@5109.13,4535
~DIR9: pad.19@1557.83,6335 U2.13 | length 1981.3
  Top Layer w10: U2.13@1350.87,4525 1379.06,4553.19 1393.37,4553.19 1443,4602.82 1443,5051.88 1367.76,5127.13 1367.76,6004.85 1421.42,6058.51 1421.42,6223.93 1510.28,6312.8 1535.63,6312.8 pad.19@1557.83,6335
~DIR10: pad.19@3240.16,6335 U3.14 | length 3045.5
  Top Layer w10: pad.19@3240.16,6335 3217.95,6312.8 3192.61,6312.8 3183.82,6304.01 3183.82,6258.58 3280.91,6161.49 3280.91,6046.09 3369.28,5957.72 3854,5957.72 4200,5611.72 4200,5385.53 4927.25,4658.28 4927.25,4572.75 5065,4435 U3.14@5109.13,4435
~DIR11: pad.19@4920.16,6335 U3.15 | length 2203.1
  Top Layer w10: pad.19@4920.16,6335 4897.95,6312.8 4872.61,6312.8 4863.82,6304.01 4863.82,6258.58 4960.91,6161.49 4960.91,6031 4891.22,5961.31 4891.22,5717.78 4748.74,5575.31 4748.74,5152.2 4800,5100.94 4800,4813.82 4947.25,4666.57 4947.25,4582.75 5045,4485 U3.15@5109.13,4485
pads on no net: *.24 *.25 *.26 *.27 *.29 *.74 *.75 JTAG1.2 U1.8 U1.9 U2.8 U2.9 U2.11 U2.12 U3.2 U3.3 U3.17 U3.18 U5.4 U5.5 U5.6 U5.7 U5.8 U5.9 U5.12 U5.13 U5.19 U5.23 U5.24 U5.25 U5.26 U5.27 U5.28 U5.29 U5.41 U5.42 U5.44 U5.45 U5.46 U5.47 U5.48 U5.49 U5.50 U5.51 U5.52 U5.59 U5.60 U5.63 U5.64 U5.65 U5.66 U5.67 U5.68 U5.69 U5.70 U5.72 U5.73 U5.75 U5.76 U5.79 U6.3 U6.6 U6.8 U6.9 U6.10 U6.11 U6.12 U6.13 U6.14 U6.24 U6.27 U6.28 U7.8 U7.9 U8.8 U8.9
copper on no net: | length 11.3
  Top Layer w10: 32,4570 40,4562
  other v1: 1714,6312 1784,6312 1854,6312 1924,6312 1714,6382 1784,6382 1854,6382 1924,6382 1714,6452 1784,6452 1854,6452 1924,6452 1714,6522 1784,6522 1854,6522 1924,6522 1714,6592 1784,6592 1854,6592 1924,6592 1714,6662 1784,6662 1854,6662 1924,6662 1714,6732 1784,6732 1854,6732 1924,6732

## Polygon pours and split planes (outlines as drawn)
+24VPRE on +24V (split plane): 5979.9,1020.1 1020.1,1020.1 1020.1,6979.9 5979.9,6979.9
GND on GND (split plane): 5979.9,1020.1 1020.1,1020.1 1020.1,6979.9 5979.9,6979.9

## Other copper
Top Layer:
  rectangle net GND: 1059,1022 2971,1297
  rectangle net +24VPRE: 4001,1022 5911,1296
  rectangle net +24VPRE: 4116,1485 4609,1787
Bottom Layer:
  rectangle net "MOTOR+_Motor 10": 5760,1020 5910,1300
  rectangle net "MOTOR-_Motor 11": 5567,1022 5715,1297
  rectangle net "MOTOR+_Motor 11": 5371,1022 5519,1297
  rectangle net "MOTOR+_Motor 7": 5175,1022 5323,1297
  rectangle net "MOTOR-_Motor 8": 4979,1022 5127,1297
  rectangle net "MOTOR+_Motor 8": 4783,1024 4931,1299
  rectangle net "MOTOR+_Motor 2": 4587,1022 4735,1297
  rectangle net "MOTOR+_Motor 5": 4391,1022 4539,1297
  rectangle net "MOTOR-_Motor 5": 4195,1022 4343,1297
  rectangle net "MOTOR-_Motor 2": 4000,1022 4148,1297
  rectangle net "MOTOR+_Motor 4": 3804,1022 3952,1297
  rectangle net "MOTOR-_Motor 1": 3214,1022 3362,1297
  rectangle net "MOTOR-_Motor 4": 3019,1022 3167,1297
  rectangle net "MOTOR-_Motor 10": 1060,1024 1208,1299
  rectangle net "MOTOR+_Motor 9": 1257,1021 1405,1296
  rectangle net "MOTOR-_Motor 9": 1450,1021 1598,1296
  rectangle net "MOTOR-_Motor 7": 1646,1021 1794,1296
  rectangle net "MOTOR+_Motor 6": 1843,1022 1991,1297
  rectangle net "MOTOR-_Motor 6": 2039,1022 2187,1297
  rectangle net "MOTOR-_Motor 0": 2235,1022 2383,1297
  rectangle net "MOTOR-_Motor 3": 2431,1022 2579,1297
  rectangle net "MOTOR+_Motor 0": 2627,1022 2775,1297
  rectangle net "MOTOR+_Motor 3": 2823,1022 2971,1297
  rectangle net "MOTOR+_Motor 1": 3607,1022 3755,1297
+24V (plane layer: these items are gaps in the copper):
  rectangle: 2763,1292 2831,1558
  rectangle: 2563,1279 2632,1548
  rectangle: 2375,1272 2441,1539
  rectangle: 2178,1274 2245,1541
  rectangle: 1980,1269 2046,1535
  rectangle: 1787,1270 1853,1484
  rectangle: 5031,6245 5326,6775
  rectangle: 5032,5138 5327,5668
  rectangle: 5030,2986 5325,3516
  rectangle: 5029,1886 5324,2416
  rectangle: 3353,1885 3648,2415
  rectangle: 3355,2987 3650,3517
  rectangle: 3349,5136 3644,5666
  rectangle: 3353,6243 3648,6773
  rectangle: 1670,6245 1965,6775
  rectangle: 1670,5136 1965,5666
  rectangle: 1679,2985 1974,3515
  rectangle: 1672,1885 1967,2415
GND (plane layer: these items are gaps in the copper):
  rectangle: 4106,1475 4620,1789

## Silkscreen, mask and mechanical layers (free items; w line width, h text height)
Top Overlay:
  drawing of 4352 lines, arcs and shapes, not listed
  text "Kanaloa" at 3972,2667 h100
  text "i ka Holo Nui" at 3694,2471 h100
  text "1" at 1051,1348 h60
  text "50" at 5838,1336 h60
Bottom Overlay:
  text "100" at 5947,1341 h60
  text "51" at 1120,1338 h60
Mechanical 13:
  circle w3.94: c5287.72,1968.9 r19.68
  circle w3.94: c3610.24,1968.9 r19.68
  circle w3.94: c5290.24,6328.9 r19.68
  circle w3.94: c1927.91,6328.9 r19.68
  circle w3.94: c1929.61,1968.9 r19.68
  circle w3.94: c3612.56,3068.9 r19.68
  circle w3.94: c5287.91,3068.9 r19.68
  circle w3.94: c1937.91,3068.9 r19.68
  circle w3.94: c1927.95,5218.9 r19.68
  circle w3.94: c3610.24,6328.9 r19.68
  circle w3.94: c5290.08,5223.9 r19.68
  circle w3.94: c3607.72,5218.9 r19.68
  lines w3.94: 1670.04,6291.5 1670.04,6728.5 1965.32,6728.5 1965.32,6291.5 1670.04,6291.5 ; 1670.08,5181.5 1670.08,5618.5 1965.35,5618.5 1965.35,5181.5 1670.08,5181.5 ; 1671.73,1931.5 1671.73,2368.5 1967.01,2368.5 1967.01,1931.5 1671.73,1931.5 ; 1680.04,3031.5 1680.04,3468.5 1975.32,3468.5 1975.32,3031.5 1680.04,3031.5 ; 3349.84,5181.5 3349.84,5618.5 3645.12,5618.5 3645.12,5181.5 3349.84,5181.5 ; 3352.36,1931.5 3352.36,2368.5 3647.64,2368.5 3647.64,1931.5 3352.36,1931.5 ; 3352.36,6291.5 3352.36,6728.5 3647.64,6728.5 3647.64,6291.5 3352.36,6291.5 ; 3354.68,3031.5 3354.68,3468.5 3649.96,3468.5 3649.96,3031.5 3354.68,3031.5 ; 5029.84,1931.5 5029.84,2368.5 5325.12,2368.5 5325.12,1931.5 5029.84,1931.5 ; 5030.04,3031.5 5030.04,3468.5 5325.31,3468.5 5325.31,3031.5 5030.04,3031.5 ; 5032.2,5186.5 5032.2,5623.5 5327.48,5623.5 5327.48,5186.5 5032.2,5186.5 ; 5032.36,6291.5 5032.36,6728.5 5327.64,6728.5 5327.64,6291.5 5032.36,6291.5
Mechanical 15:
  lines w3.94: 1797.99,6510 1837.36,6510 ; 1798.03,5400 1837.4,5400 ; 1799.68,2150 1839.06,2150 ; 1807.99,3250 1847.36,3250 ; 1817.72,5380.31 1817.72,5419.69 ; 1817.68,6490.31 1817.68,6529.69 ; 1819.37,2130.32 1819.37,2169.68 ; 1827.68,3230.32 1827.68,3269.68 ; 3477.8,5400 3517.17,5400 ; 3480.31,2150 3519.68,2150 ; 3480.31,6510 3519.68,6510 ; 3482.64,3250 3522.01,3250 ; 3497.48,5380.31 3497.48,5419.69 ; 3500,2130.32 3500,2169.68 ; 3500,6490.31 3500,6529.69 ; 3502.32,3230.32 3502.32,3269.68 ; 5157.8,2150 5197.17,2150 ; 5157.99,3250 5197.36,3250 ; 5160.16,5405 5199.53,5405 ; 5160.31,6510 5199.69,6510 ; 5177.48,2130.32 5177.48,2169.68 ; 5177.68,3230.32 5177.68,3269.68 ; 5179.84,5385.31 5179.84,5424.69 ; 5180,6490.31 5180,6529.69 ; 1507.64,6281.65 1507.64,6738.35 2127.72,6738.35 2127.72,6281.65 1507.64,6281.65 ; 1507.68,5171.65 1507.68,5628.35 2127.76,5628.35 2127.76,5171.65 1507.68,5171.65 ; 1509.33,1921.65 1509.33,2378.35 2129.41,2378.35 2129.41,1921.65 1509.33,1921.65 ; 1517.64,3021.65 1517.64,3478.35 2137.72,3478.35 2137.72,3021.65 1517.64,3021.65 ; 3187.44,5171.65 3187.44,5628.35 3807.52,5628.35 3807.52,5171.65 3187.44,5171.65 ; 3189.96,1921.65 3189.96,2378.35 3810.04,2378.35 3810.04,1921.65 3189.96,1921.65 ; 3189.96,6281.65 3189.96,6738.35 3810.04,6738.35 3810.04,6281.65 3189.96,6281.65 ; 3192.28,3021.65 3192.28,3478.35 3812.36,3478.35 3812.36,3021.65 3192.28,3021.65 ; 4867.44,1921.65 4867.44,2378.35 5487.52,2378.35 5487.52,1921.65 4867.44,1921.65 ; 4867.64,3021.65 4867.64,3478.35 5487.72,3478.35 5487.72,3021.65 4867.64,3021.65 ; 4869.8,5176.65 4869.8,5633.35 5489.88,5633.35 5489.88,5176.65 4869.8,5176.65 ; 4869.96,6281.65 4869.96,6738.35 5490.04,6738.35 5490.04,6281.65 4869.96,6281.65

## Text inside footprints (layer, text, board x,y; h text height)
JTAG1: Top Overlay "6" at 2790,4158 h50; Top Overlay "5" at 3052,4165 h50; Top Overlay "2" at 2794,3945 h50; Top Overlay "1" at 3055,3945 h50